# EAGLE board converter adapter - Copy (2) (EAGLE 6.4)
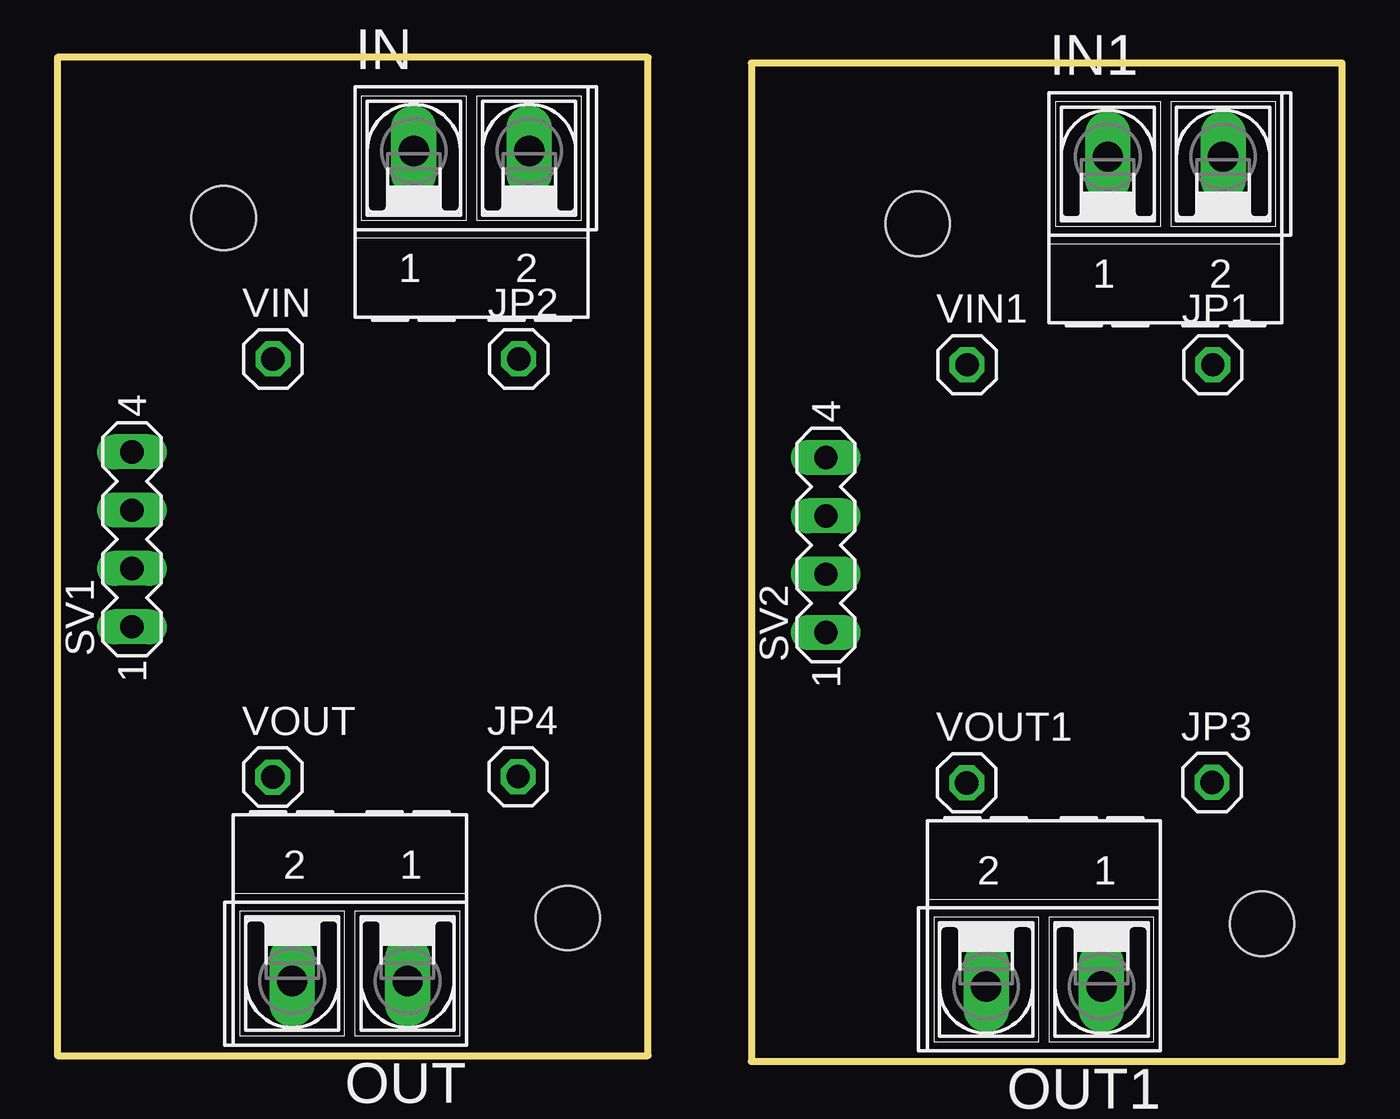
[diagram p0: board, top side]
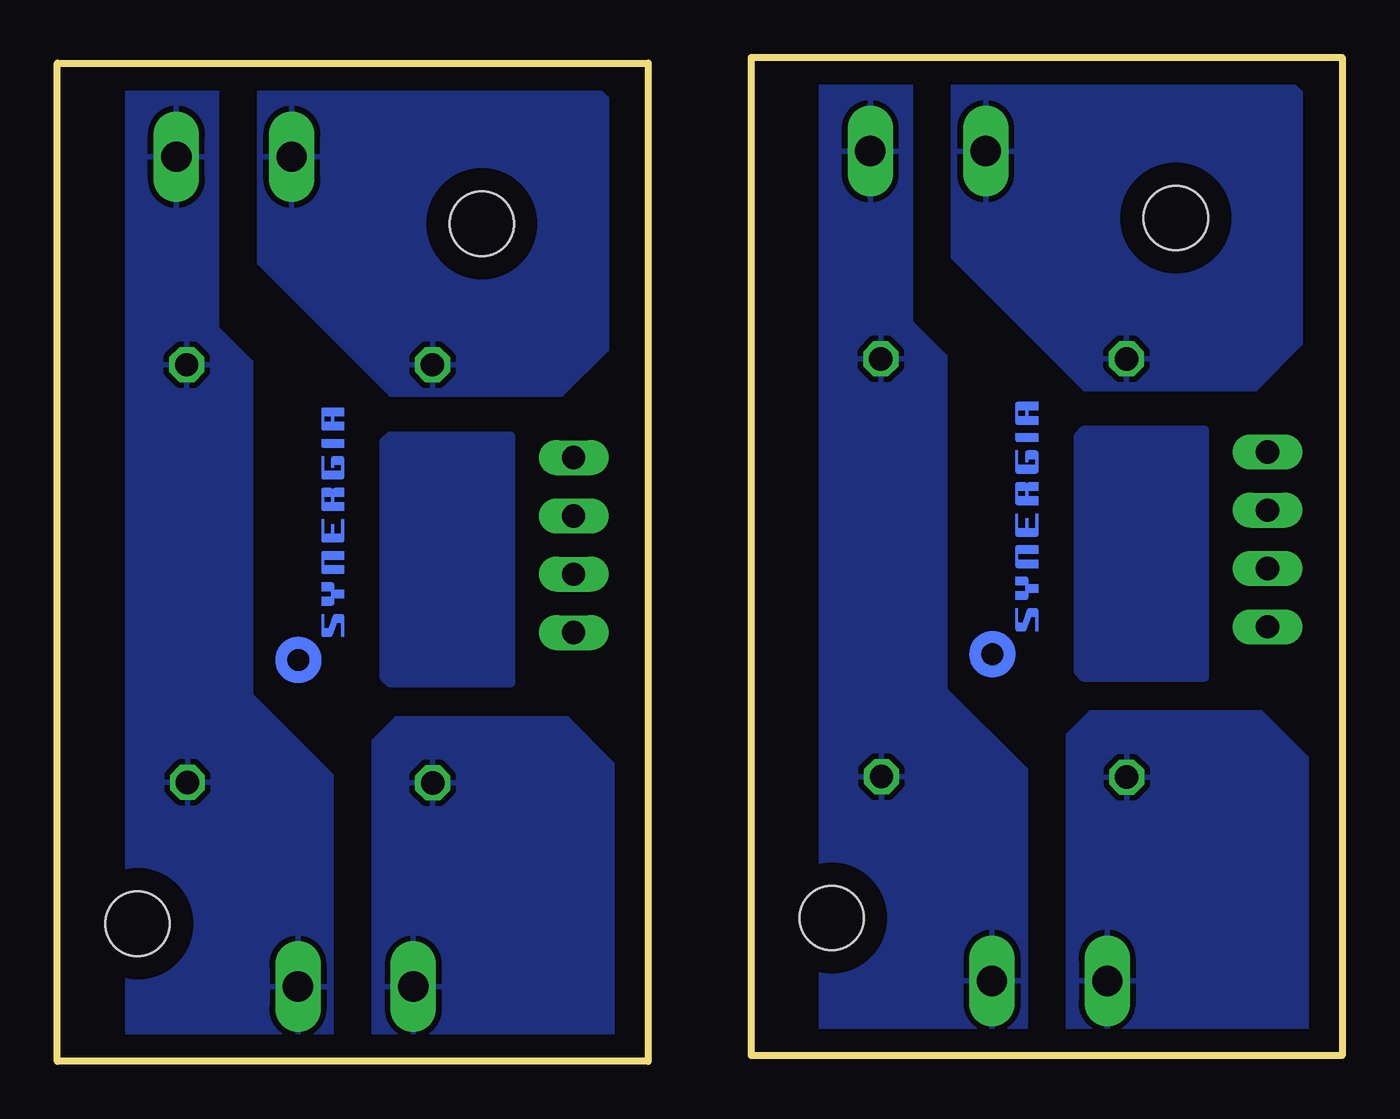
[diagram p1: board, bottom side, seen from below]

Size 56 x 43.75 mm. Coordinates in mm from the lower left corner, seen from the top.
Outline: 0,0.25 25.75,0.25 25.75,43.75 0,43.75 0,0.25
Outline: 30.25,0 56,0 56,43.5 30.25,43.5 30.25,0
Copper layers (1*16): Top 0.035mm / dielectric 1.5mm / Bottom 0.035mm
Design rules "default": minimum track width 10mil, minimum drill 24mil, track to track 8mil, track to pad 8mil, pad to pad 8mil, via to via 8mil, smd to smd 8mil, copper to edge 40mil, drill to drill 8mil, minimum pad ring 10mil, minimum via ring 8mil, stop-mask expansion 4mil, vias tented up to drill 0mil, thermal gap 10mil
Holes 2.8 mm at 22.25,6.25 7.25,36.75 52.5,6 37.5,36.5

## Footprints (pad centres in the part's own frame; a part is rotated, then mirrored left to right if it is on the bottom)
AK500/2-H = drill 1.321 long: 1 -2.515,0; 2 2.515,0
1X01 = drill 1.016 octagon: 1 0,0
MA04-1 = drill 1.016 long: 1 -3.81,0; 2 -1.27,0; 3 1.27,0; 4 3.81,0

## Placement (x,y rotation side)
IN  [AK500/2-H]  18.05,39.67 0 top
IN1  [AK500/2-H]  48.3,39.42 0 top
JP1  [1X01]  50.36,30.36 0 top
JP2  [1X01]  20.11,30.61 0 top
JP3  [1X01]  50.33,12.16 0 top
JP4  [1X01]  20.08,12.41 0 top
OUT  [AK500/2-H]  12.75,3.51 180 top
OUT1  [AK500/2-H]  43,3.26 180 top
SV1  [MA04-1]  3.25,22.75 90 top
SV2  [MA04-1]  33.5,22.5 90 top
U$1  [SYNERGIA_12MM]  13.25,16.75 90 bottom
U$2  [SYNERGIA_12MM]  43.5,16.5 90 bottom
VIN  [1X01]  9.4,30.61 0 top
VIN1  [1X01]  39.65,30.36 0 top
VOUT  [1X01]  9.39,12.39 0 top
VOUT1  [1X01]  39.64,12.14 0 top

## Library data of the parts
IN IN1 OUT OUT1 = con-ptr500; OC_FARNELL: unknown; OC_NEWARK: unknown
JP1-JP4 VIN VIN1 VOUT VOUT1 = pinhead
SV1 SV2 = con-lstb; OC_FARNELL: unknown; OC_NEWARK: unknown
U$1 U$2 = synergia_logo

## Nets
GND: IN.2 JP2.1 JP4.1 OUT.1
GND1: IN1.2 JP1.1 JP3.1 OUT1.1
N$1: OUT.2 VOUT.1
N$3: OUT1.2 VOUT1.1
N$4: IN.1 VIN.1
N$5: IN1.1 VIN1.1

## Tracks (layer width: path | path; a pad name or v marks a point on that pad's centre or on a via)
GND
  pour Bottom: 18.75,43.25 18.75,32.25 17.25,30.75 17.25,16.25 13.75,12.75 13.75,1.25 22.75,1.25 22.75,43.25
GND1
  pour Bottom: 49,43 49,32 47.5,30.5 47.5,16 44,12.5 44,1 53,1 53,43
N$1
  pour Bottom: 12,1.25 12,14.25 11,15.25 3.5,15.25 1.5,13.25 1.5,1.25
N$2
  pour Bottom: 11.25,27.5 6,27.5 6,16.75 11.25,16.75 11.5,17 11.5,27.25
N$3
  pour Bottom: 42.25,1 42.25,14 41.25,15 33.75,15 31.75,13 31.75,1
N$4
  pour Bottom: 17,43.25 17,35 11.25,29.25 3.75,29.25 1.75,31.25 1.75,42.25 2.75,43.25
N$5
  pour Bottom: 47.25,43 47.25,34.75 41.5,29 34,29 32,31 32,42 33,43
N$6
  pour Bottom: 41.5,27.25 36.25,27.25 36.25,16.5 41.5,16.5 41.75,16.75 41.75,27